# Altium PCB ee453_pcb_yourname.PcbDoc
Units mil, origin at the board's own origin, x right, y up, seen from the top; angles counter-clockwise.
Board outline 6000 x 5000 mil, 3 copper layers (Top Layer, Mid-Layer 3, Bottom Layer); 16 components, 0 nets, 242 pads, 0 vias.
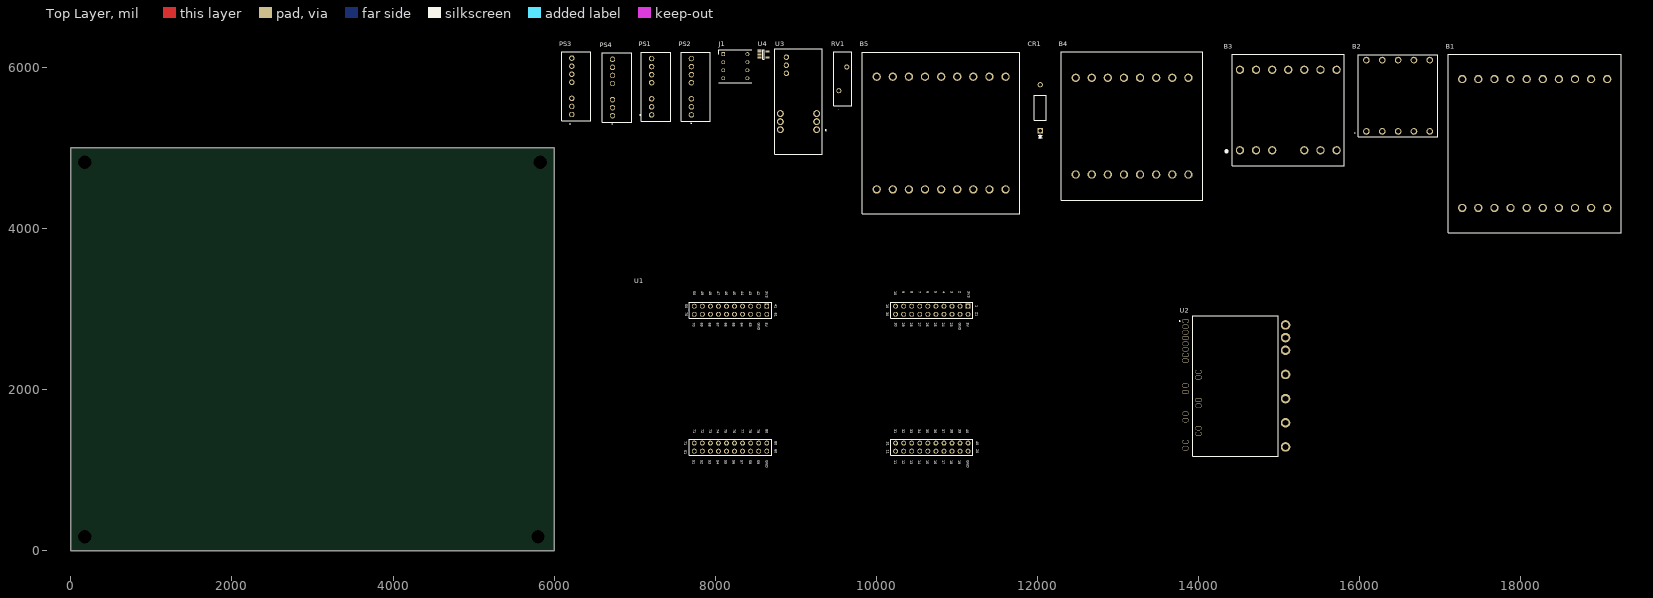
[diagram p0: Top Layer view]
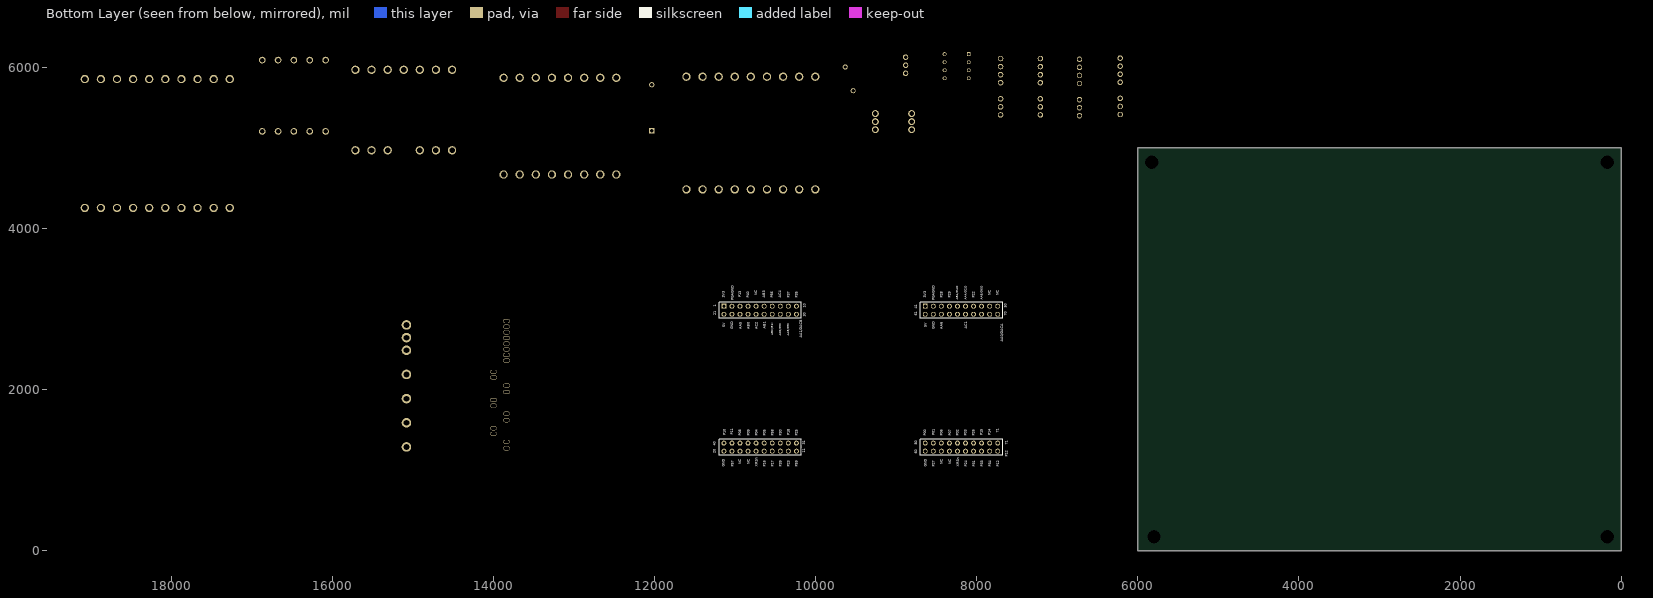
[diagram p1: Bottom Layer view, seen from below]

## Layer stack, top to bottom
Top Solder: solder mask 0.4, Solder Resist, Dk 3.5
Top Layer: signal copper 1.4
Dielectric 1: dielectric 12.6, FR-4, Dk 4.8
Mid-Layer 3: signal copper 1.4
Dielectric2: dielectric 12.6, FR-4, Dk 4.8
Bottom Layer: signal copper 1.4
Bottom Solder: solder mask 0.4, Solder Resist, Dk 3.5

## Board outline
0,0 6000,0 6000,5000 0,5000

## Design rules (kind name [scope] priority, off if disabled: settings)
Clearance [All] p1: gap=10 ignorepadtopadclearanceinfootprint=FALSE except(0: Arc-Hole Track-Hole SMDPad-Hole THPad-Hole Via-Hole Fill-Hole Poly-Hole Region-Hole Text-Hole)
PolygonConnect [All] p1: connectstyle=Relief reliefconductorwidth=10 reliefentries=4 polygonreliefangle="90 Angle" airgapwidth=10
RoutingVias [All] p1: holewidth=28 width=50 viastyle="Through Hole" minholewidth=28 minwidth=50 maxholewidth=28 maxwidth=50
SolderMaskExpansion [All] p1: expansion=4 istentingtop=FALSE
Width [All] p1: maxlimit=10 minlimit=10 preferedwidth=10
30 further rules are at their usual default settings.

## Components (designator, comment, footprint, x,y, rotation, side; value= is the part's Value field where it differs from the comment)
B1 "B66368B1020T1" B66368B1020T1 17275,4255 r0 top
B2 "B66422W1010D1" B66422W1010D1 16085,5205 r0 top
B3 "B66359B1013T001" B66359B1013T001 15115,5470 r0 top
B4 "B66364B1016T001" B66364B1016T001 12475,4670 r0 top
B5 "B66366B1018T001" B66366B1018T001 10805,5185 r0 top
CR1 "Part Number: P6KE91A" P6KESeries 12035,5785 r90 top value=Value
J1 "DILB8P-223TLF" DIPS762W60P254L1016H525Q8N 8100,6165 r0 top
PS1 "RS3-2415D" RS32405DH3 7210,5410 r90 top
PS2 "RS3-2412S" RS32415S 7705,5410 r90 top
PS3 "RS3-243.3S" RS32433S 6220,5415 r90 top
PS4 "RS3-2415S" RS32415S 6725,5400 r90 top
RV1 "V68ZS10P" V68ZS10P 9535,5710 r90 top
U1 "C2000" C2000 9440,2135 r0 top
U2 "FNB34060T" FNB34060T 14460,2045 r90 top
U3 "LAH_25-NP" LAH-25-NP 8740,6230 r90 top
U4 "INA194AIDBVR" SOT95P280X145-5N 8600,6160 r0 top

## Footprints (in the part's own frame and the unit in brackets; to place one, negate y for a bottom-side part, rotate by r counter-clockwise, add the part's x,y. Pads: shape width x height; smd on the part's side, far side on the other; paste and mask are expansions set on the pad)
B66359B1013T001 [mm]
  round 2.625 hole 1.75: 1(-15.24,-12.7) 2(-10.16,-12.7) 3(-5.08,-12.7) 4(5.08,-12.7) 5(10.16,-12.7) 6(15.24,-12.7) 7(15.24,12.7) 8(10.16,12.7) 9(5.08,12.7) 10(0,12.7) 11(-5.08,12.7) 12(-10.16,12.7) 13(-15.24,12.7)
  silkscreen extent -19.5,-17.6 17.65,17.6, body extent -17.65,-17.6 17.65,17.6, height 25
B66364B1016T001 [mm]
  round 2.625 hole 1.75: 1(0,0) 2(5.08,0) 3(10.16,0) 4(15.24,0) 5(20.32,0) 6(25.4,0) 7(30.48,0) 8(35.56,0) 9(35.56,30.48) 10(30.48,30.48) 11(25.4,30.48) 12(20.32,30.48) 13(15.24,30.48) 14(10.16,30.48) 15(5.08,30.48) 16(0,30.48)
  silkscreen extent -4.52,-8.16 40.08,38.64, body extent -4.52,-8.16 40.08,38.64, height 35.5
B66366B1018T001 [mm]
  round 2.625 hole 1.75: 1(-20.32,-17.78) 2(-15.24,-17.78) 3(-10.16,-17.78) 4(-5.08,-17.78) 5(0,-17.78) 6(5.08,-17.78) 7(10.16,-17.78) 8(15.24,-17.78) 9(20.32,-17.78) 10(20.32,17.78) 11(15.24,17.78) 12(10.16,17.78) 13(5.08,17.78) 14(0,17.78) 15(-5.08,17.78) 16(-10.16,17.78) 17(-15.24,17.78) 18(-20.32,17.78)
  silkscreen extent -24.8,-25.5 24.8,25.5, body extent -24.8,-25.5 24.8,25.5, height 38.4
B66368B1020T1 [mm]
  round 2.625 hole 1.75: 1(0,0) 2(5.08,0) 3(10.16,0) 4(15.24,0) 5(20.32,0) 6(25.4,0) 7(30.48,0) 8(35.56,0) 9(40.64,0) 10(45.72,0) 11(45.72,40.64) 12(40.64,40.64) 13(35.56,40.64) 14(30.48,40.64) 15(25.4,40.64) 16(20.32,40.64) 17(15.24,40.64) 18(10.16,40.64) 19(5.08,40.64) 20(0,40.64)
  silkscreen extent -4.39,-7.78 50.11,48.42, body extent -4.39,-7.78 50.11,48.42, height 40.9
B66422W1010D1 [mm]
  round 2.1 hole 1.4: 1(0,0) 2(5,0) 3(10,0) 4(15,0) 5(20,0) 6(20,22.5) 7(15,22.5) 8(10,22.5) 9(5,22.5) 10(0,22.5)
  silkscreen extent -3.7,-1.75 22.5,24.25, body extent -2.5,-1.75 22.5,24.25, height 12
C2000 [mm]
  rrect6% 1.55x1.55 hole 1.02: 1(43.18,22.86) 41(-20.32,22.86)
  round 1.55 hole 1.02: 2(40.64,22.86) 3(38.1,22.86) 4(35.56,22.86) 5(33.02,22.86) 6(30.48,22.86) 7(27.94,22.86) 8(25.4,22.86) 9(22.86,22.86) 10(20.32,22.86) 11(20.32,-22.86) 12(22.86,-22.86) 13(25.4,-22.86) 14(27.94,-22.86) 15(30.48,-22.86) 16(33.02,-22.86) 17(35.56,-22.86) 18(38.1,-22.86) 19(40.64,-22.86) 20(43.18,-22.86) 21(43.18,20.32) 22(40.64,20.32) 23(38.1,20.32) 24(35.56,20.32) 25(33.02,20.32) 26(30.48,20.32) 27(27.94,20.32) 28(25.4,20.32) 29(22.86,20.32) 30(20.32,20.32) 31(20.32,-20.32) 32(22.86,-20.32) 33(25.4,-20.32) 34(27.94,-20.32) 35(30.48,-20.32) 36(33.02,-20.32) 37(35.56,-20.32) 38(38.1,-20.32) 39(40.64,-20.32) 40(43.18,-20.32) 42(-22.86,22.86) 43(-25.4,22.86) 44(-27.94,22.86) 45(-30.48,22.86) 46(-33.02,22.86) 47(-35.56,22.86) 48(-38.1,22.86) 49(-40.64,22.86) 50(-43.18,22.86) 51(-43.18,-22.86) 52(-40.64,-22.86) 53(-38.1,-22.86) 54(-35.56,-22.86) 55(-33.02,-22.86) 56(-30.48,-22.86) 57(-27.94,-22.86) 58(-25.4,-22.86) 59(-22.86,-22.86) 60(-20.32,-22.86) 61(-20.32,20.32) 62(-22.86,20.32) 63(-25.4,20.32) 64(-27.94,20.32) 65(-30.48,20.32) 66(-33.02,20.32) 67(-35.56,20.32) 68(-38.1,20.32) 69(-40.64,20.32) 70(-43.18,20.32) 71(-43.18,-20.32) 72(-40.64,-20.32) 73(-38.1,-20.32) 74(-35.56,-20.32) 75(-33.02,-20.32) 76(-30.48,-20.32) 77(-27.94,-20.32) 78(-25.4,-20.32) 79(-22.86,-20.32) 80(-20.32,-20.32)
  silkscreen extent -44.7,-24.07 44.7,24.07, body extent -44.7,-24.07 44.7,24.07, height 8.51
DIPS762W60P254L1016H525Q8N [mm]
  rect 1.2x1.2 hole 0.8: 1(0,0)
  round 1.2 hole 0.8: 2(0,-2.54) 3(0,-5.08) 4(0,-7.62) 5(7.62,-7.62) 6(7.62,-5.08) 7(7.62,-2.54) 8(7.62,0)
  silkscreen extent -1.42,-9.04 9.04,1.42
FNB34060T [mm]
  oval 1.3x2 hole 1.6 slot 0.9 at 0 deg paste-1000 mask+0: 1(20.447,15.78) 2(18.669,15.78) 3(16.891,15.78) 4(15.113,15.78) 5(13.335,15.78) 6(11.557,15.78) 7(9.779,15.78) 8(8.001,15.78) 9(4.445,11.68) 10(2.667,11.68) 11(0.136,15.78) 12(-1.914,15.78) 13(-4.445,11.68) 14(-6.223,11.68) 15(-8.754,15.78) 16(-10.804,15.78) 17(-13.335,11.68) 18(-15.113,11.68) 19(-17.644,15.78) 20(-19.694,15.78)
  round 3 hole 1.8 paste-1000 mask+0: 21(19.24,-15.78) 22(15.24,-15.78) 23(11.24,-15.78) 24(3.62,-15.78) 25(-4,-15.78) 26(-11.62,-15.78) 27(-19.24,-15.78)
  silkscreen extent -22.1,-13.5 22.1,17.75, body extent -21.96,-16.1 21.97,16.38, height 5.61
LAH-25-NP [mm]
  round 2.18 hole 1.48: 1(-25.49,-13.19) 2(-22.95,-13.19) 3(-20.41,-13.19) 4(-20.41,-1.76) 5(-22.95,-1.76) 6(-25.49,-1.76)
  round 1.7 hole 1.12: 7(-7.71,-3.665) 8(-5.17,-3.665) 9(-2.63,-3.665)
  silkscreen extent -33.2,-16.21 0,0
P6KESeries [mil]
  rect 64x64 hole 44: 1(-572,0)
  round 64 hole 44: 2(0,0)
  silkscreen extent -669,-75 -131,75, body extent 0,0 10,10, height 10
RS32405DH3 [mm]
  round 1.725 hole 1.15: 1(0,0) 2(2.54,0) 3(5.08,0) 5(10.16,0) 6(12.7,0) 7(15.24,0) 8(17.78,0)
  silkscreen extent -2,-6 19.8,3.8, body extent -2,-6 19.8,3.2, height 11.45
RS32415S [mm]
  round 1.725 hole 1.15: 1(0,0) 2(2.54,0) 3(5.08,0) 5(10.16,0) 6(12.7,0) 7(15.24,0) 8(17.78,0)
  silkscreen extent -2.71,-6 19.79,3.2, body extent -2.01,-6 19.79,3.2, height 11.45
RS32433S [mm]
  round 1.725 hole 1.15: 1(0,0) 2(2.54,0) 3(5.08,0) 5(10.16,0) 6(12.7,0) 7(15.24,0) 8(17.78,0)
  silkscreen extent -3.05,-6 19.79,3.2, body extent -2.01,-6 19.79,3.2, height 11.45
SOT95P280X145-5N [mm]
  rect 1.2x0.6 smd: 1(-1.25,0.95) 2(-1.25,0) 3(-1.25,-0.95) 4(1.25,-0.95) 5(1.25,0.95)
  silkscreen extent -1.85,-1.45 0.3,1.5, body extent -1.4,-1.45 1.4,1.45, height 1.45
V68ZS10P [mm]
  round 1.59 hole 1.06: 1(0,0) 2(7.5,-2.5)
  silkscreen extent -5.9,-4.05 12.25,1.55, body extent -4.75,-4.05 12.25,1.55, height 20.1

## Part data
B1: "Bobbin", Manufacturer_Name=EPCOS, Mouser2 Part Number=871-B66368B1020T1, Datasheet Link=https://componentsearchengine.com/Datasheets/1/B66368B1020T1.pdf, Height=40.9mm, Manufacturer_Part_Number=B66368B1020T1, Mouser2 Price/Stock=https://www.mouser.com/Search/Refine.aspx?Keyword=871-B66368B1020T1
B2: "Bobbin", Manufacturer_Name=EPCOS, Mouser2 Part Number=871-B66422W1010D1, Datasheet Link=https://componentsearchengine.com/Datasheets/1/B66422W1010D1.pdf, Height=12mm, Manufacturer_Part_Number=B66422W1010D1, Mouser2 Price/Stock=https://www.mouser.com/Search/Refine.aspx?Keyword=871-B66422W1010D1
B3: "Bobbin", Manufacturer_Name=EPCOS, Mouser2 Part Number=871-B66359B1013T001, Datasheet Link=https://componentsearchengine.com/Datasheets/1/B66359B1013T001.pdf, Height=25mm, Manufacturer_Part_Number=B66359B1013T001, Mouser2 Price/Stock=https://www.mouser.com/Search/Refine.aspx?Keyword=871-B66359B1013T001
B4: "Bobbin", Manufacturer_Name=EPCOS, Mouser2 Part Number=871-B66364B1016T001, Datasheet Link=https://componentsearchengine.com/Datasheets/1/B66364B1016T001.pdf, Height=35.5mm, Manufacturer_Part_Number=B66364B1016T001, Mouser2 Price/Stock=https://www.mouser.com/Search/Refine.aspx?Keyword=871-B66364B1016T001
B5: "Bobbin", Manufacturer_Name=EPCOS, RS Part Number=1620179, Datasheet Link=http://uk.rs-online.com/web/p/products/1620179, Height=38.4mm, Manufacturer_Part_Number=B66366B1018T001, RS Price/Stock=http://uk.rs-online.com/web/p/products/1620179
CR1: library part P6KE91A, "No Description Available", Built_By=EMA_UL_Team, Copyright="Copyright (C) 2018 Accelerated Designs. All rights reserved", Manufacturer_Part_Number=P6KE91A, RefDes=RefDes, Type=DEV, Vendor="Littelfuse Inc"
J1: "Connector", Manufacturer_Name=Amphenol, Mouser2 Part Number=649-DILB8P223TLF, Datasheet Link=https://componentsearchengine.com/Datasheets/1/DILB8P-223TLF.pdf, Height=5.25mm, Manufacturer_Part_Number=DILB8P-223TLF, Mouser2 Price/Stock=https://www.mouser.com/Search/Refine.aspx?Keyword=649-DILB8P223TLF
PS1: "Power Supply", Manufacturer_Name="RECOM Power", Mouser Part Number=919-RS3-2415D, RS Part Number=1669089, Allied Price/Stock=https://www.alliedelec.com/recom-power-inc-rs3-2415d/70052275/, Allied_Number=70052275, Datasheet Link=https://www.recom-power.com/pdf/Econoline/RS3-S_D_Z.pdf, Height=11.35mm, Manufacturer_Part_Number=RS3-2415D, Mouser Price/Stock=https://www.mouser.com/Search/Refine.aspx?Keyword=919-RS3-2415D, RS Price/Stock=https://uk.rs-online.com/web/p/products/1669089
PS2: "Power Supply", Manufacturer_Name="RECOM Power", Mouser Part Number=919-RS3-2412S, RS Part Number=1669097, Datasheet Link=https://www.recom-power.com/pdf/Econoline/RS3-S_D_Z.pdf, Manufacturer_Part_Number=RS3-2412S, Mouser Price/Stock=https://www.mouser.com/Search/Refine.aspx?Keyword=919-RS3-2412S, RS Price/Stock=https://uk.rs-online.com/web/p/products/1669097
PS3: "Power Supply", Manufacturer_Name="RECOM Power", Mouser Part Number=919-RS3-243.3S, RS Part Number=0163748P, Datasheet Link=https://www.arrow.com/en/products/rs3-243.3s/recom-power, Height=11.35mm, Manufacturer_Part_Number=RS3-243.3S, Mouser Price/Stock=https://www.mouser.com/Search/Refine.aspx?Keyword=919-RS3-243.3S, RS Price/Stock=http://uk.rs-online.com/web/p/products/0163748P
PS4: "Power Supply", Manufacturer_Name="RECOM Power", Mouser Part Number=919-RS3-2415S, Datasheet Link=https://www.recom-power.com/pdf/Econoline/RS3-S_D_Z.pdf, Height=11.35mm, Manufacturer_Part_Number=RS3-2415S, Mouser Price/Stock=https://www.mouser.com/Search/Refine.aspx?Keyword=919-RS3-2415S
RV1: "Varistor", Manufacturer_Name=LITTELFUSE, Datasheet Link=http://www.littelfuse.com/~/media/electronics/datasheets/varistors/littelfuse_varistor_za_datasheet.pdf.pdf, Height=20mm, Manufacturer_Part_Number=V68ZS10P
U1: "F280049C", Parameter 1="test 2"
U3: "Integrated Circuit", Manufacturer_Name=LEM, Manufacturer_Part_Number="LAH 25-NP", Datasheet Link=http://www.lem.com/docs/products/lah_25-np.pdf
U4: "Integrated Circuit", Manufacturer_Name="Texas Instruments", Datasheet Link=http://www.ti.com/lit/gpn/ina194, Height=1.45mm, Manufacturer_Part_Number=INA194AIDBVR

## Free pads (board coordinates)
  round 60 hole 167 unplated: M1(175,175) M2(175,4825) M3(5825,4825) M4(5800,175)

## Nets (pads, with @x,y where several pads share a name; then routed paths per layer and width w, separated by ;. In a path a pad name is that pad's centre, name@x,y a point inside that pad or via, vN(x,y) a via of type N, cw(c..) or ccw(c..) an arc to the next point about the centre after c; other vN are vias at no path point)
pads on no net: B1.1 B1.2 B1.3 B1.4 B1.5 B1.6 B1.7 B1.8 B1.9 B1.10 B1.11 B1.12 B1.13 B1.14 B1.15 B1.16 B1.17 B1.18 B1.19 B1.20 B2.1 B2.2 B2.3 B2.4 B2.5 B2.6 B2.7 B2.8 B2.9 B2.10 B3.1 B3.2 B3.3 B3.4 B3.5 B3.6 B3.7 B3.8 B3.9 B3.10 B3.11 B3.12 B3.13 B4.1 B4.2 B4.3 B4.4 B4.5 B4.6 B4.7 B4.8 B4.9 B4.10 B4.11 B4.12 B4.13 B4.14 B4.15 B4.16 B5.1 B5.2 B5.3 B5.4 B5.5 B5.6 B5.7 B5.8 B5.9 B5.10 B5.11 B5.12 B5.13 B5.14 B5.15 B5.16 B5.17 B5.18 CR1.1 CR1.2 J1.1 J1.2 J1.3 J1.4 J1.5 J1.6 J1.7 J1.8 PS1.1 PS1.2 PS1.3 PS1.5 PS1.6 PS1.7 PS1.8 PS2.1 PS2.2 PS2.3 PS2.5 PS2.6 PS2.7 PS2.8 PS3.1 PS3.2 PS3.3 PS3.5 PS3.6 PS3.7 PS3.8 PS4.1 PS4.2 PS4.3 PS4.5 PS4.6 PS4.7 PS4.8 RV1.1 RV1.2 U1.1 U1.2 U1.3 U1.4 U1.5 U1.6 U1.7 U1.8 U1.9 U1.10 U1.11 U1.12 U1.13 U1.14 U1.15 U1.16 U1.17 U1.18 U1.19 U1.20 U1.21 U1.22 U1.23 U1.24 U1.25 U1.26 U1.27 U1.28 U1.29 U1.30 U1.31 U1.32 U1.33 U1.34 U1.35 U1.36 U1.37 U1.38 U1.39 U1.40 U1.41 U1.42 U1.43 U1.44 U1.45 U1.46 U1.47 U1.48 U1.49 U1.50 U1.51 U1.52 U1.53 U1.54 U1.55 U1.56 U1.57 U1.58 U1.59 U1.60 U1.61 U1.62 U1.63 U1.64 U1.65 U1.66 U1.67 U1.68 U1.69 U1.70 U1.71 U1.72 U1.73 U1.74 U1.75 U1.76 U1.77 U1.78 U1.79 U1.80 U2.1 U2.2 U2.3 U2.4 U2.5 U2.6 U2.7 U2.8 U2.9 U2.10 U2.11 U2.12 U2.13 U2.14 U2.15 U2.16 U2.17 U2.18 U2.19 U2.20 U2.21 U2.22 U2.23 U2.24 U2.25 U2.26 U2.27 U3.1 U3.2 U3.3 U3.4 U3.5 U3.6 U3.7 U3.8 U3.9 U4.1 U4.2 U4.3 U4.4 U4.5

## Text inside footprints (layer, text, board x,y; h text height)
CR1: Mechanical 13 "0.3in/7.62mm" at 11895,5424 h25 r90; Mechanical 13 "0.572in/14.529mm" at 12200,5399 h25 r90; Mechanical 13 "0.14in/3.556mm" at 12047.5,5905 h25 r90
U1: Top Overlay "51" at 7615,1246.85 h30 r270; Top Overlay "71" at 7613.46,1357.38 h30 r270; Top Overlay "40" at 11120,1505.15 h30 r270; Top Overlay "GND" at 8625,1121.85 h30 r270; Top Overlay "3V3" at 8628.05,3219.94 h30 r270; Top Overlay "GND" at 8526.45,2826.57 h30 r270; Top Overlay "5V" at 8623.05,2826.57 h30 r270; Top Overlay "3V3" at 11133.05,3219.94 h30 r270; Top Overlay "5V" at 11123.05,2826.57 h30 r270; Top Overlay "GND" at 11026.45,2826.57 h30 r270; Top Overlay "GND" at 11125,1121.85 h30 r270; Top Overlay "40" at 11243.05,1360 h30 r270; Top Overlay "31" at 10130,1355 h30 r270; Top Overlay "11" at 10130,1252 h30 r270; Top Overlay "20" at 11243.05,1260 h30 r270; Top Overlay "21" at 11235,2960 h30 r270; Top Overlay "30" at 10125,2960 h30 r270; Top Overlay "1" at 11235,3045 h30 r270; Top Overlay "10" at 10125,3057 h30 r270; Top Overlay "71" at 7730,1505.15 h30 r270; Top Overlay "80" at 8740,1360 h30 r270; Top Overlay "60" at 8740,1260 h30 r270; Top Overlay "70" at 7630,2960 h30 r270; Top Overlay "50" at 7630,3057 h30 r270; Top Overlay "61" at 8740,2955 h30 r270; Top Overlay "41" at 8740,3060 h30 r270; Top Overlay "2" at 11025,3219.94 h30 r270; Top Overlay "3" at 10925,3219.94 h30 r270; Top Overlay "4" at 10825,3219.94 h30 r270; Top Overlay "5" at 10725,3219.94 h30 r270; Top Overlay "6" at 10625,3219.94 h30 r270; Top Overlay "7" at 10525,3219.94 h30 r270; Top Overlay "8" at 10425,3219.94 h30 r270; Top Overlay "9" at 10325,3219.94 h30 r270; Top Overlay "10" at 10225,3219.94 h30 r270; Top Overlay "23" at 10920,2826.57 h30 r270; Top Overlay "24" at 10820,2826.57 h30 r270; Top Overlay "25" at 10720,2826.57 h30 r270; Top Overlay "26" at 10620,2826.57 h30 r270; Top Overlay "28" at 10420,2826.57 h30 r270; Top Overlay "29" at 10320,2826.57 h30 r270; Top Overlay "30" at 10230,2826.57 h30 r270; Top Overlay "70" at 7720,2826.57 h30 r270; Top Overlay "69" at 7820,2826.57 h30 r270; Top Overlay "68" at 7920,2826.57 h30 r270; Top Overlay "66" at 8120,2826.57 h30 r270; Top Overlay "65" at 8220,2826.57 h30 r270; Top Overlay "64" at 8320,2826.57 h30 r270; Top Overlay "63" at 8420,2826.57 h30 r270; Top Overlay "50" at 7725,3219.94 h30 r270; Top Overlay "49" at 7825,3219.94 h30 r270; Top Overlay "48" at 7925,3219.94 h30 r270; Top Overlay "47" at 8025,3219.94 h30 r270; Top Overlay "46" at 8125,3219.94 h30 r270; Top Overlay "45" at 8225,3219.94 h30 r270; Top Overlay "44" at 8325,3219.94 h30 r270; Top Overlay "43" at 8425,3219.94 h30 r270; Top Overlay "42" at 8525,3219.94 h30 r270; Top Overlay "67" at 8020,2826.57 h30 r270; Top Overlay "54" at 8020,1121.85 h30 r270; Top Overlay "77" at 8323.66,1505.15 h30 r270; Top Overlay "76" at 8223.66,1505.15 h30 r270; Top Overlay "75" at 8120,1505.15 h30 r270; Top Overlay "74" at 8020,1505.15 h30 r270; Top Overlay "73" at 7923.66,1505.15 h30 r270; Top Overlay "72" at 7823.66,1505.15 h30 r270; Top Overlay "80" at 8628.66,1505.15 h30 r270; Top Overlay "58" at 8420,1121.85 h30 r270; Top Overlay "57" at 8320,1121.85 h30 r270; Top Overlay "56" at 8220,1121.85 h30 r270; Top Overlay "55" at 8120,1121.85 h30 r270; Top Overlay "53" at 7920,1121.85 h30 r270; Top Overlay "52" at 7820,1121.85 h30 r270; Top Overlay "51" at 7720,1121.85 h30 r270; Top Overlay "14" at 10520,1121.85 h30 r270; Top Overlay "37" at 10820,1505.15 h30 r270; Top Overlay "36" at 10720,1505.15 h30 r270; Top Overlay "35" at 10620,1505.15 h30 r270; Top Overlay "34" at 10520,1505.15 h30 r270; Top Overlay "33" at 10420,1505.15 h30 r270; Top Overlay "32" at 10320,1505.15 h30 r270; Top Overlay "31" at 10220,1505.15 h30 r270; Top Overlay "18" at 10920,1121.85 h30 r270; Top Overlay "17" at 10820,1121.85 h30 r270; Top Overlay "16" at 10720,1121.85 h30 r270; Top Overlay "15" at 10620,1121.85 h30 r270; Top Overlay "13" at 10420,1121.85 h30 r270; Top Overlay "12" at 10320,1121.85 h30 r270; Top Overlay "11" at 10220,1121.85 h30 r270; Top Overlay "59" at 8520,1121.85 h30 r270; Top Overlay "19" at 11020,1121.85 h30 r270; Top Overlay "27" at 10520,2826.57 h30 r270; Top Overlay "38" at 10925,1505.15 h30 r270; Top Overlay "39" at 11025,1505.15 h30 r270; Top Overlay "79" at 8523.66,1505.15 h30 r270; Top Overlay "78" at 8423.66,1505.15 h30 r270; Bottom Overlay "P12" at 7615,1166.88 h30 r270; Bottom Overlay "71" at 7613.46,1317.39 h30 r270; Bottom Overlay "GND" at 8623.05,1041.88 h30 r270; Bottom Overlay "GND" at 11128.05,1041.88 h30 r270; Bottom Overlay "3V3" at 11130,3139.97 h30 r270; Bottom Overlay "5V" at 11123.05,2776.59 h30 r270; Bottom Overlay "GND" at 11025,2746.6 h30 r270; Bottom Overlay "3V3" at 8630,3139.97 h30 r270; Bottom Overlay "5V" at 8623.05,2776.59 h30 r270; Bottom Overlay "GND" at 8525,2746.6 h30 r270; Bottom Overlay "1" at 11235,3030 h30 r270; Bottom Overlay "21" at 11235,2920 h30 r270; Bottom Overlay "10" at 10125,3015 h30 r270; Bottom Overlay "30" at 10125,2905 h30 r270; Bottom Overlay "20" at 11243.05,1210 h30 r270; Bottom Overlay "40" at 11243.05,1305 h30 r270; Bottom Overlay "11" at 10130,1215 h30 r270; Bottom Overlay "31" at 10130,1315 h30 r270; Bottom Overlay "70" at 7630,2915 h30 r270; Bottom Overlay "50" at 7630,3015 h30 r270; Bottom Overlay "61" at 8740,2915 h30 r270; Bottom Overlay "41" at 8740,3005 h30 r270; Bottom Overlay "71" at 7730,1465.16 h30 r270; Bottom Overlay "80" at 8740,1315 h30 r270; Bottom Overlay "60" at 8740,1205 h30 r270; Bottom Overlay "P57" at 11020,1041.88 h30 r270; Bottom Overlay "NC" at 10925,1071.87 h30 r270; Bottom Overlay "NC" at 10820,1071.87 h30 r270; Bottom Overlay "XRSn" at 10720,1041.88 h30 r270; Bottom Overlay "P16" at 10620,1041.88 h30 r270; Bottom Overlay "P17" at 10520,1041.88 h30 r270; Bottom Overlay "P39" at 10420,1041.88 h30 r270; Bottom Overlay "P23" at 10320,1041.88 h30 r270; Bottom Overlay "P59" at 10220,1041.88 h30 r270; Bottom Overlay "P10" at 11120,1430.17 h30 r270; Bottom Overlay "P11" at 11025,1440.17 h30 r270; Bottom Overlay "P08" at 10925,1425.17 h30 r270; Bottom Overlay "P09" at 10820,1425.17 h30 r270; Bottom Overlay "P04" at 10720,1425.17 h30 r270; Bottom Overlay "P05" at 10620,1425.17 h30 r270; Bottom Overlay "P58" at 10520,1425.17 h30 r270; Bottom Overlay "P30" at 10420,1425.17 h30 r270; Bottom Overlay "P18" at 10320,1430.17 h30 r270; Bottom Overlay "P25" at 10220,1425.17 h30 r270; Bottom Overlay "P14" at 7823.66,1430.17 h30 r270; Bottom Overlay "P15" at 7923.66,1430.17 h30 r270; Bottom Overlay "P26" at 8023.66,1425.17 h30 r270; Bottom Overlay "P03" at 8123.66,1425.17 h30 r270; Bottom Overlay "P02" at 8223.66,1425.17 h30 r270; Bottom Overlay "P07" at 8318.66,1425.17 h30 r270; Bottom Overlay "P06" at 8423.66,1425.17 h30 r270; Bottom Overlay "P01" at 8523.66,1435.17 h30 r270; Bottom Overlay "P00" at 8628.66,1425.17 h30 r270; Bottom Overlay "P12" at 7720,1041.88 h30 r270; Bottom Overlay "P34" at 7820,1041.88 h30 r270; Bottom Overlay "P33" at 7920,1041.88 h30 r270; Bottom Overlay "P31" at 8020,1041.88 h30 r270; Bottom Overlay "P24" at 8120,1041.88 h30 r270; Bottom Overlay "XRSn" at 8220,1041.88 h30 r270; Bottom Overlay "NC" at 8320,1071.87 h30 r270; Bottom Overlay "NC" at 8420,1071.87 h30 r270; Bottom Overlay "P27" at 8520,1041.88 h30 r270; Bottom Overlay "AA6" at 8420,2746.6 h30 r270; Bottom Overlay "AC1" at 8120,2756.6 h30 r270; Bottom Overlay "AA0/DACA" at 7670,2596.65 h30 r270; Bottom Overlay "PGAGND" at 8520,3110 h30 r270; Bottom Overlay "P28" at 8425,3139.97 h30 r270; Bottom Overlay "P29" at 8325,3139.97 h30 r270; Bottom Overlay "P22" at 8025,3139.97 h30 r270; Bottom Overlay "NC" at 7825,3169.96 h30 r270; Bottom Overlay "NC" at 7725,3169.96 h30 r270; Bottom Overlay "P35" at 10225,3139.97 h30 r270; Bottom Overlay "P37" at 10325,3139.97 h30 r270; Bottom Overlay "P56" at 10525,3139.97 h30 r270; Bottom Overlay "P40" at 10825,3139.97 h30 r270; Bottom Overlay "P13" at 10925,3144.97 h30 r270; Bottom Overlay "PGAGND" at 11020,3110 h30 r270; Bottom Overlay "AB1" at 10620,2756.6 h30 r270; Bottom Overlay "AC2" at 10720,2746.6 h30 r270; Bottom Overlay "AB0" at 10820,2746.6 h30 r270; Bottom Overlay "AA5" at 10920,2746.6 h30 r270; Bottom Overlay "NC" at 10725,3169.96 h30 r270; Bottom Overlay "AB3" at 10625,3139.97 h30 r270; Bottom Overlay "AC4" at 10425,3139.97 h30 r270; Bottom Overlay "AB4/G4O" at 8230,3114.33 h25 r270; Bottom Overlay "AA4/G2O" at 8125,3114.33 h25 r270; Bottom Overlay "AA8/G6O" at 7925,3114.33 h25 r270; Bottom Overlay "AA1/DACB" at 10170,2645 h30 r270; Bottom Overlay "AA9/G5I" at 10330,2669.29 h25 r270; Bottom Overlay "AC0/G3I" at 10425,2669.29 h25 r270; Bottom Overlay "AB2/G1I" at 10530,2673.46 h25 r270